# Altium PCB Sensor shoot2.PcbDoc
Units mm, origin at the board's own origin, x right, y up, seen from the top; angles counter-clockwise.
Board outline 29.97 x 10.67 mm, 2 copper layers (Top Layer, Bottom Layer); 2 components, 3 nets, 13 pads, 0 vias.
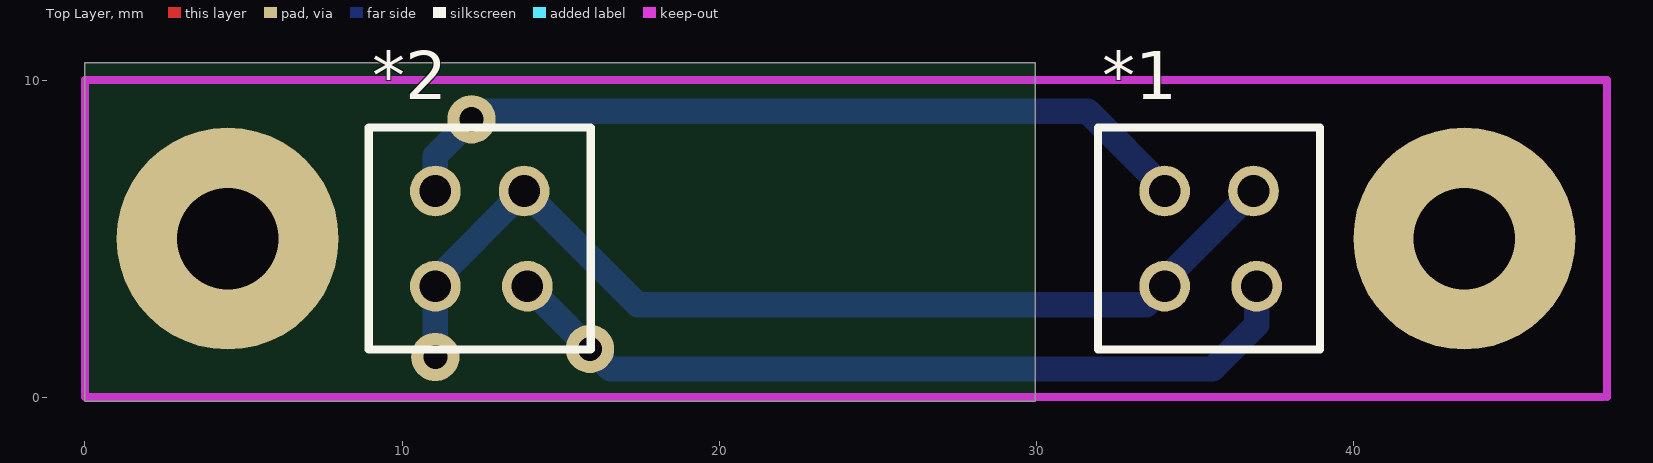
[diagram p0: Top Layer view]
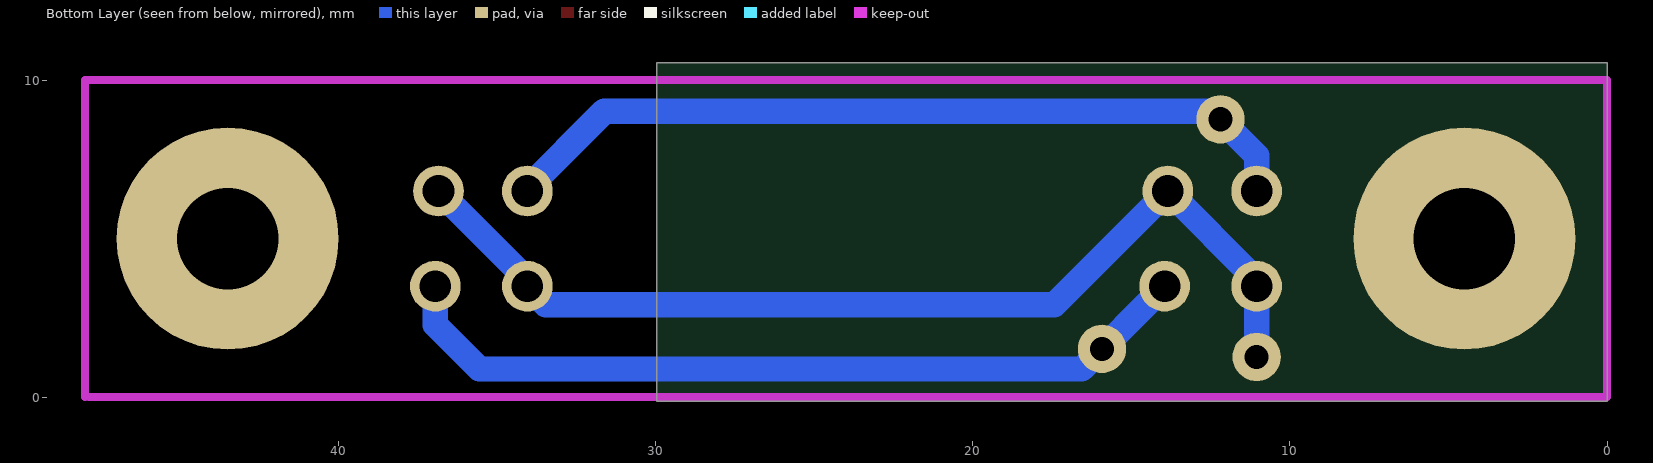
[diagram p1: Bottom Layer view, seen from below]

## Layer stack, top to bottom
Top Layer: signal copper 0.0356
Dielectric: dielectric 0.32, FR-4, Dk 4.8
Bottom Layer: signal copper 0.0356

## Board outline
0,-0.127 0,10.541 29.972,10.541 29.972,-0.127 0,-0.127

## Design rules (kind name [scope] priority, off if disabled: settings)
Clearance [All] p1: gap=0.254
PolygonConnect [All] p1: connectstyle=Relief reliefconductorwidth=0.254 reliefentries=4 polygonreliefangle="90 Angle" airgapwidth=0.254
RoutingVias [All] p1: holewidth=0.711 width=1.27 viastyle="Through Hole" minholewidth=0.711 minwidth=1.27 maxholewidth=0.711 maxwidth=1.27
SolderMaskExpansion [All] p1: expansion=0.102
Width [All] p1: maxlimit=2 minlimit=0.254 preferedwidth=0.6 minimp=50.000000 maximp=50.000000 favimp=50.000000
28 further rules are at their usual default settings.

## Components (designator, comment, footprint, x,y, rotation, side; value= is the part's Value field where it differs from the comment)
*1 "CNY70" CNY70 35.5,5 r0 top
*2 "CNY70" CNY70 12.5,5 r0 top

## Footprints (in the part's own frame and the unit in brackets; to place one, negate y for a bottom-side part, rotate by r counter-clockwise, add the part's x,y. Pads: shape width x height; smd on the part's side, far side on the other; paste and mask are expansions set on the pad)
CNY70 [mm]
  round 1.6 hole 1: 0(-1.45,-1.5) 1(-1.45,1.5) 2(1.35,1.5) 3(1.45,-1.5)
  silkscreen extent -3.55,-3.5 3.45,3.5

## Free pads (board coordinates)
  round 7 hole 3.2: 0(4.5,5) 0(43.5,5)
  round 1.524 hole 0.762: 1(12.192,8.763) 2(15.926,1.524) 3(11.05,1.27)

## Nets (pads, with @x,y where several pads share a name; then routed paths per layer and width w, separated by ;. In a path a pad name is that pad's centre, name@x,y a point inside that pad or via, vN(x,y) a via of type N, cw(c..) or ccw(c..) an arc to the next point about the centre after c; other vN are vias at no path point)
GND: *1.0 *1.2 *2.0 *2.2 pad.3 | length 32.7
  Bottom Layer w0.8: pad.3@11.049,1.016 11.05,1.017 *2.0 11.05,3.7 *2.2 17.429,2.921 33.471,2.921 *1.0 34.05,3.7 *1.2
OUT: *1.3 *2.3 pad.2 | length 25.9
  Bottom Layer w0.8: *2.3 16.561,0.889 35.56,0.889 36.95,2.279 *1.3
VCC: *1.1 *2.1 pad.1 | length 25.8
  Bottom Layer w0.8: *2.1 11.05,7.621 12.446,9.017 31.623,9.017 *1.1@34.099,6.54

## Keep-outs
Keep-Out Layer:
  lines w0.254: 47.879,0 0,0 0,10 48,10 48,0